# Altium PCB LM_001_Rev_C.PcbDoc (part 2 of 2)
Units mm, origin at the board's own origin, x right, y up, seen from the top; angles counter-clockwise.
Board outline 67 x 180 mm, 4 copper layers (Top Layer, +5V, Signal Layer 1, Bottom Layer), stack 0.778 mm thick; 103 components, 93 nets, 340 pads, 85 vias.
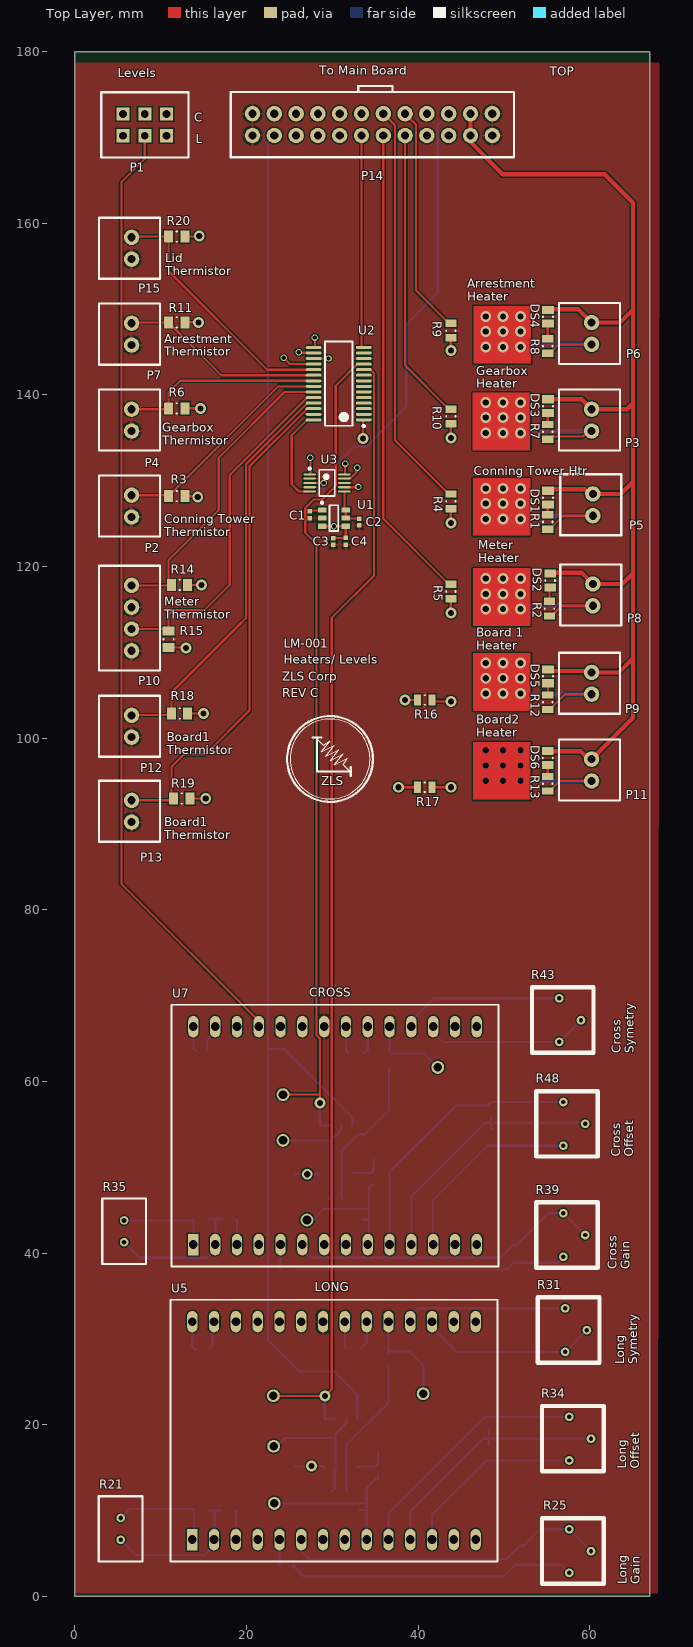
[diagram p0: Top Layer view]

## Via types
v1: diameter 1.27, hole 0.711, Top Layer to Bottom Layer, 66 vias
v2: diameter 0.75, hole 0.5, Top Layer to Bottom Layer, 10 vias
v3: diameter 0.711, hole 0.711, Top Layer to Bottom Layer, 9 vias

## Nets (pads, with @x,y where several pads share a name; then routed paths per layer and width w, separated by ;. In a path a pad name is that pad's centre, name@x,y a point inside that pad or via, vN(x,y) a via of type N, cw(c..) or ccw(c..) an arc to the next point about the centre after c; other vN are vias at no path point) (continued)
"MUX A3": (continued)
  Top Layer w0.254: P14.11@33.298,170.084 33.388,169.994 33.388,145.576 33.433,145.532 U2.14@33.559,145.532
MUX_A0: P14.8 U2.17 | length 30.7
  Top Layer w0.254: U2.17@27.909,144.231 v2(29.553,144.231)
  Signal Layer 1 w0.254: P14.8@28.218,172.624 28.44,172.624 29.553,171.511 v2(29.553,144.231)
MUX_A1: P14.6 U2.16 | length 30.6
  Top Layer w0.254: v2(26.073,144.968) 26.141,144.9 27.891,144.9 U2.16@27.909,144.882
  Signal Layer 1 w0.254: P14.6@25.678,172.624 25.9,172.624 27.038,171.486 27.038,148.704 26.073,147.739 v2(26.073,144.968)
NetC1_1: C1.1 U1.1 | length 1.5
  Top Layer w0.254: C1.1 27.443,126.511 28.718,126.511 U1.1
NetC6_1: C6.1 U5.28 | length 3.5
  Bottom Layer w0.254: U5.28 13.673,29.115 C6.1
NetC8_1: C8.1 U5.21 | length 3.1
  Bottom Layer w0.254: U5.21 31.453,29.115 C8.1
NetC8_2: C8.2 U5.20 | length 3.3
  Bottom Layer w0.254: C8.2 33.993,29.537 U5.20
NetC9_1: C9.1 U7.21 | length 3.3
  Bottom Layer w0.254: U7.21 31.578,63.534 C9.1
NetC9_2: C9.2 U7.20 | length 3.3
  Bottom Layer w0.254: C9.2 34.118,63.698 U7.20
NetC11_1: C11.1 U7.28 | length 2.9
  Bottom Layer w0.254: U7.28 13.798,63.871 C11.1
NetQ1_1: Q1.1 R4.2 | length 1.7
  Top Layer w0.254: v1(43.798,125.084) R4.2
NetQ2_1: Q2.1 R5.2 | length 1.7
  Top Layer w0.254: v1(43.798,114.584) R5.2
NetQ3_1: Q3.1 R9.2 | length 1.4
  Top Layer w0.254: v1(43.798,145.184) R9.2
NetQ4_1: Q4.1 R10.2 | length 1.7
  Top Layer w0.254: v1(43.798,134.984) R10.2
NetQ5_1: Q5.1 R16.2 | length 2.3
  Top Layer w0.254: R16.2 41.75,104.284 v1(43.798,104.284)
NetQ6_1: Q6.1 R17.2 | length 2.2
  Top Layer w0.254: R17.2 v1(43.802,94.27)
NetR21_1: R21.1 R23.1 R24.1 U5.2 | length 17.5
  Bottom Layer w0.254: R21.1 7.084,4.826 15.08,4.826 16.213,5.959 16.298,6.044 16.298,9.984 ; R23.1@15.648,9.984 16.298,9.984 ; R24.1@16.948,9.984 16.298,9.984
NetR21_2: R21.2 R23.2 U5.1 | length 12.6
  Bottom Layer w0.254: R21.2 6.35,10.157 13.879,10.157 R23.2 13.882,6.818 U5.1
NetR22_1: R22.1 R28.2 U4.6 | length 16.6
  Bottom Layer w0.254: R22.1 31.623,12.328 U4.6 31.623,17.653 36.538,22.568 R28.2
NetR22_2: R22.2 TP3.1 U4.3 U4.7 | length 16.7
  Bottom Layer w0.254: TP3.1 23.533,17.485 24.498,18.451 30.353,18.451 ; R22.2 30.271,12.576 30.271,14.955 U4.7 30.353,18.451 ; U4.3 31.623,20.188 30.353,18.918 30.353,18.451
NetR24_2: R24.2 U5.3 | length 3.4
  Bottom Layer w0.254: R24.2@18.648,9.984 18.753,9.879 U5.3
NetR25_1: R25.1 R25.2 R27.2 U5.6 | length 38
  Bottom Layer w0.254: U5.6 26.373,5.247 27.267,4.354 50.269,4.354 51.816,5.901 52.266,5.901 54.173,7.808 R25.1 R25.2
NetR25_3: R25.3 R26.1 R27.1 | length 33.7
  Bottom Layer w0.254: R26.1@25.45,3.668 25.45,3.529 26.632,2.347 49.962,2.347 51.293,3.678 56.645,3.678 R25.3
NetR26_2: R26.2 U5.5 | length 3.1
  Bottom Layer w0.254: R26.2 23.833,3.601 U5.5
NetR29_1: R29.1 R33.2 U4.5 | length 3.8
  Bottom Layer w0.254: U4.5 32.972,15.116 34.995,15.116 R29.1 35.306,15.427 R33.2
NetR30_1: R30.1 R32.1 R34.2 U5.11 | length 29.7
  Bottom Layer w0.254: U5.11 39.073,9.894 47.553,18.374 48.26,18.374 ; R32.1 48.26,18.374 ; R30.1 48.26,18.374 ; R34.2 48.26,18.374
NetR30_2: R30.2 R34.1 U5.10 | length 28.8
  Bottom Layer w0.254: U5.10 36.533,9.668 47.779,20.914 R34.1
NetR31_1: R31.1 U5.18 | length 19.1
  Bottom Layer w0.254: U5.18 39.073,32.659 39.974,33.56 R31.1
NetR31_2: R31.2 R31.3 U5.17 | length 20.9
  Bottom Layer w0.254: U5.17 41.613,31.359 44.493,28.48 R31.3 R31.2
NetR32_2: R32.2 R34.3 U5.12 | length 21.5
  Bottom Layer w0.254: U5.12 41.613,9.492 47.955,15.834 R34.3
NetR35_1: R35.1 R36.1 R37.1 U7.2 | length 16.3
  Bottom Layer w0.254: R35.1 7.53,39.457 15.461,39.457 U7.2@16.338,40.334 ; R36.1 16.383,43.942 ; U7.2 16.338,43.897 16.383,43.942 ; R37.1 16.383,43.942
NetR35_2: R35.2 R36.2 U7.1 | length 11
  Bottom Layer w0.254: R35.2 13.74,43.8 13.798,43.858 U7.1
NetR37_2: R37.2 U7.3 | length 3.1
  Bottom Layer w0.254: R37.2@18.648,43.984 18.878,43.754 U7.3
NetR38_1: R38.1 R45.2 U6.6 | length 18.2
  Bottom Layer w0.254: R38.1 31.052,46.402 U6.6 31.052,51.88 33.02,53.848 33.782,53.848 36.576,56.642 R45.2
NetR38_2: R38.2 TP7.1 U6.3 U6.7 | length 14.8
  Bottom Layer w0.254: TP7.1 29.744,53.122 29.782,53.084 ; R38.2 29.782,46.504 U6.7 29.782,53.084 ; U6.3 31.052,54.354 29.782,53.084
NetR39_1: R39.1 R39.2 R41.2 U7.6 | length 37.2
  Bottom Layer w0.254: U7.6 26.498,40.334 27.375,39.457 49.558,39.457 51.068,40.967 51.518,40.967 55.189,44.638 R39.1 R39.2
NetR39_3: R39.3 R40.1 R41.1 | length 31.9
  Bottom Layer w0.254: R40.1 50.38,38.1 R41.1 51.474,38.862 56.213,38.862 R39.3
NetR40_2: R40.2 U7.5 | length 2.9
  Bottom Layer w0.254: U7.5 23.958,38.184 R40.2
NetR42_1: R42.1 R44.1 R48.2 U7.11 | length 30.8
  Bottom Layer w0.254: U7.11 39.198,46.595 47.782,55.179 48.514,55.179 ; R44.1 48.514,55.179 ; R42.1 48.514,55.179 ; R48.2@59.449,55.179 48.514,55.179
NetR42_2: R42.2 R48.1 U7.10 | length 32.1
  Bottom Layer w0.254: U7.10 36.658,49.437 44.415,57.194 48.116,57.194 48.514,57.592 56.836,57.592 R48.1@56.909,57.664
NetR43_1: R43.1 U7.18 | length 19
  Bottom Layer w0.254: U7.18 39.198,67.034 41.847,69.682 56.473,69.682 R43.1@56.477,69.679
NetR43_2: R43.2 R43.3 U7.17 | length 19.4
  Bottom Layer w0.254: U7.17 41.738,65.734 42.87,64.602 56.418,64.602 56.422,64.599 R43.2
NetR44_2: R44.2 R48.3 U7.12 | length 23
  Bottom Layer w0.254: U7.12 41.738,46.193 48.057,52.512 56.836,52.512 R48.3@56.909,52.584
NetR46_1: R46.1 R47.2 U6.5 | length 4
  Bottom Layer w0.254: U6.5 32.447,49.33 34.487,49.33 R46.1 R47.2@34.785,50.951
NetTP2_1: TP2.1 U2.10 U4.1 U4.2 | length 133
  Top Layer w0.254: TP2.1@23.101,23.302 23.127,23.327 v1(29.147,23.327) 29.915,24.096 29.915,114.012 34.861,118.958 34.861,142.48 34.409,142.932 U2.10@33.559,142.932
  Bottom Layer w0.254: v1(29.147,23.327) 29.115,23.296 29.115,20.719 U4.1 U4.2
NetTP6_1: TP6.1 U2.11 U6.1 U6.2 | length 98.8
  Top Layer w0.254: TP6.1 28.537,58.456 ; v1(28.537,57.465) 28.537,58.456 ; U2.11@33.559,143.582 32.909,143.582 30.391,141.064 30.391,129.373 28.816,127.798 27.818,127.798 26.831,126.811 26.831,123.941 28.161,122.611 28.161,65.371 28.537,64.995 28.537,58.456
  Bottom Layer w0.254: v1(28.537,57.465) 28.524,57.452 28.524,54.867 U6.1 U6.2
SPI0_MISO: P14.9 U3.1 | length 40.9
  Top Layer w0.254: U3.1 27.43,130.736 27.432,130.738 v2(27.432,132.671)
  Signal Layer 1 w0.254: v2(27.432,132.671) 30.848,136.086 30.848,169.994 P14.9@30.758,170.084
SPI0_SCLK: P14.10 U3.10 | length 42.9
  Top Layer w0.254: U3.10 31.481,130.736 31.483,130.738 v2(31.483,131.989)
  Signal Layer 1 w0.254: P14.10@30.758,172.624 30.98,172.624 32.118,171.486 32.118,132.624 v2(31.483,131.989)
Thermistor_CS0: P14.12 U3.9 | length 44.8
  Top Layer w0.254: U3.9 31.989,130.236 32.087,130.334 32.16,130.334 32.785,130.96 32.785,131.411 v2(32.88,131.506)
  Signal Layer 1 w0.254: v2(32.88,131.506) 34.658,133.284 34.658,171.486 33.52,172.624 P14.12@33.298,172.624
VR_REF_Cross: C13.1 R46.2 TP8.1 U7.9 | length 15.8
  Bottom Layer w0.254: TP8.1 27.673,43.851 28.943,45.121 34.262,45.121 ; C13.1@33.407,43.901 33.433,43.876 C13.1@34.262,43.876 ; U7.9@34.077,41.128 34.262,41.313 C13.1@34.262,43.876 ; R46.2 34.56,47.928 34.262,47.63 34.262,45.121 ; C13.1@34.262,43.876 34.262,45.121
VR_REF_Long: C10.1 R29.2 TP4.1 U5.9 | length 20
  Bottom Layer w0.254: TP4.1 33.993,10.831 ; C10.1@33.103,10.069 33.968,10.069 33.993,10.094 ; U5.9@33.961,6.577 U5.9 33.993,10.094 ; 35.293,14.248 R29.2 35.068,13.714 33.993,12.639 33.993,10.831 ; 33.993,10.094 33.993,10.831
pads on no net: P14.4 P14.5 U2.2 U2.3 U2.4 U2.5 U2.6 U2.7 U2.8 U2.9 U2.13 U5.4 U5.8 U5.13 U5.14 U5.15 U5.16 U5.23 U5.26 U7.4 U7.8 U7.13 U7.14 U7.15 U7.16 U7.23 U7.26

## Polygon pours and split planes (outlines as drawn)
GND on Top Layer "Top_GND" (solid, pour order 1): -0.01,178.684 68.098,178.684 67.898,0.356 -0.01,0.356
GND on Bottom Layer "Bottom_GND" (solid, pour order 0): -0.01,-0.016 68.098,-0.016 68.098,178.684 -0.01,178.684
GND on Signal Layer 1 "Top_GND" (solid, pour order 3): -0.165,179.298 67.943,179.298 67.943,0.598 -0.165,0.598
+5 on +5V (split plane): 66.49,179.49 66.49,0.51 0.51,0.51 0.51,179.49

## Other copper
Top Layer:
  rectangle net "Arrestment Htr Out": 46.444,143.647 53.15,150.353
  rectangle net "Gearbox Htr Out": 46.342,133.538 53.048,140.244
  rectangle net "Conning Tower Htr Out": 46.368,123.581 53.073,130.287
  rectangle net METER_HTR_OUT: 46.368,113.091 53.073,119.797
  rectangle net "Board2 Htr Out": 46.393,92.822 53.099,99.527
  rectangle net "Board1 Htr Out": 46.393,103.185 53.099,109.891

## Silkscreen, mask and mechanical layers (free items; w line width, h text height)
Top Overlay:
  circle w0.254: c29.722,97.567 r5
  circle w0.1: c29.722,97.567 r4.663
  lines w0.127: 28.198,99.929 28.96,99.167 29.722,99.675 28.706,98.405 30.23,99.167 29.214,97.897 30.738,98.659 29.722,97.389 31.246,98.151 30.23,96.881 31.754,97.643 31.246,96.881 32.008,96.119
  lines w0.254: 27.69,100.056 28.706,100.056 ; 28.198,99.929 28.198,96.119 32.008,96.119 ; 32.135,95.611 32.135,96.627 ; 33,175.311 33,176 37,176 37,175.336
  text "To Main Board" at 28.448,177.292 h1
  text "TOP" at 55.317,177.152 h1
  text "Levels" at 5,177 h1
  text "C" at 13.907,171.841 h1
  text "L" at 14.059,169.301 h1
  text "Lid / Thermistor" at 10.528,153.96 h1
  text "Arrestment / Heater" at 45.72,150.959 h1
  text "Arrestment / Thermistor" at 10.414,144.526 h1
  text "Gearbox / Heater" at 46.736,140.799 h1
  text "Gearbox / Thermistor" at 10.16,134.195 h1
  text "Conning Tower Htr" at 46.482,130.639 h1
  text "Conning Tower / Thermistor" at 10.414,123.527 h1
  text "Meter / Heater" at 46.99,120.479 h1
  text "Meter / Thermistor" at 10.401,113.929 h1
  text "LM-001" at 24.308,110.541 h1
  text "Board 1 / Heater" at 46.736,110.319 h1
  text "Heaters/ Levels" at 24.308,108.636 h1
  text "ZLS Corp" at 24.13,106.68 h1
  text "REV C" at 24.13,104.775 h1
  text "Board2 / Heater" at 46.736,100.159 h1
  text "Board1 / Thermistor" at 10.668,98.127 h1
  text "ZLS" at 28.706,94.519 h1
  text "Board1 / Thermistor" at 10.414,88.221 h1
  text "CROSS" at 27.305,69.85 h1
  text "Cross / Symetry" at 65.088,63.256 h1 r90
  text "Cross / Offset" at 65.037,51.191 h1 r90
  text "Cross / Gain" at 64.63,38.11 h1 r90
  text "LONG" at 27.94,35.56 h1
  text "Long / Symetry" at 65.494,27.036 h1 r90
  text "Long / Offset" at 65.748,14.895 h1 r90
  text "Long / Gain" at 65.799,1.433 h1 r90

## Dimensions
0,180 to 67,180 on Mechanical 13
0,0 to 67,0 on Mechanical 13
67,0 to 67,180 on Mechanical 13